# Altium PCB Connect_PCB.PcbDoc
Units mil, origin at the board's own origin, x right, y up, seen from the top; angles counter-clockwise.
Board outline 6000 x 4000 mil, 2 copper layers (Top Layer, Bottom Layer); 15 components, 34 nets, 130 pads, 14 vias.
Unrouted connection lines stored in the file: 1.
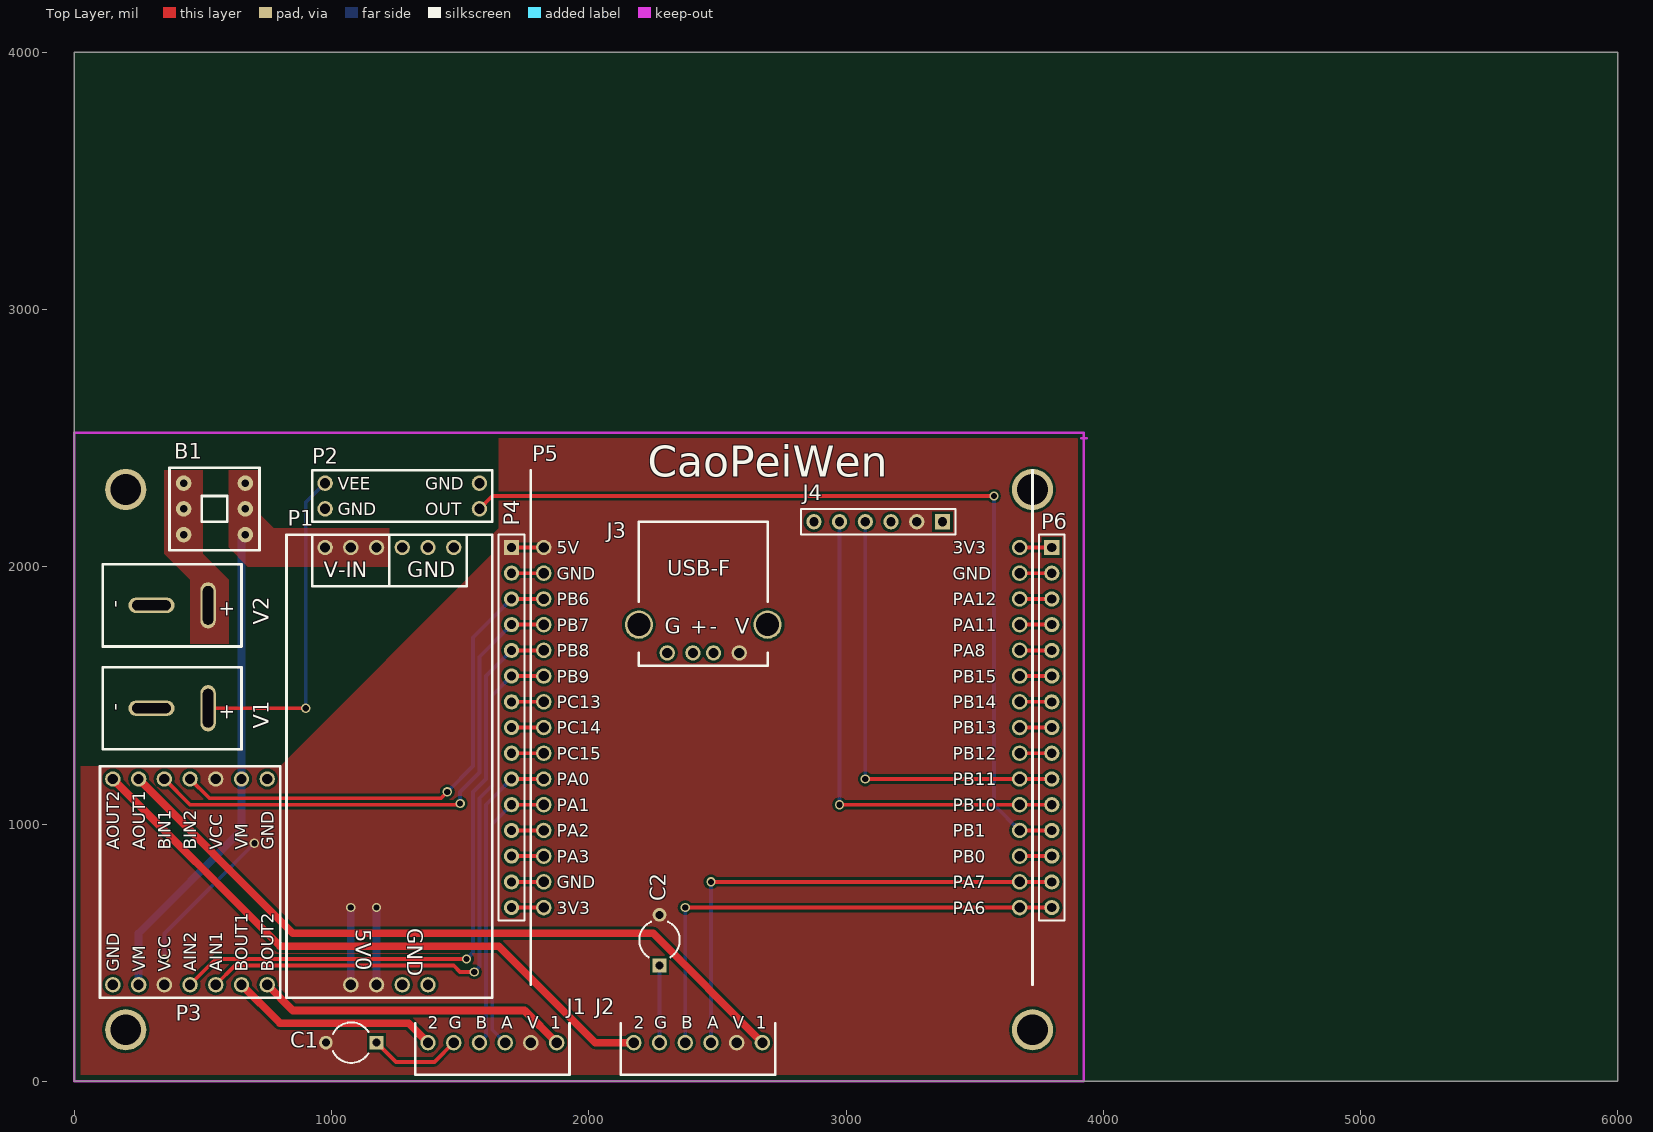
[diagram p0: Top Layer view]
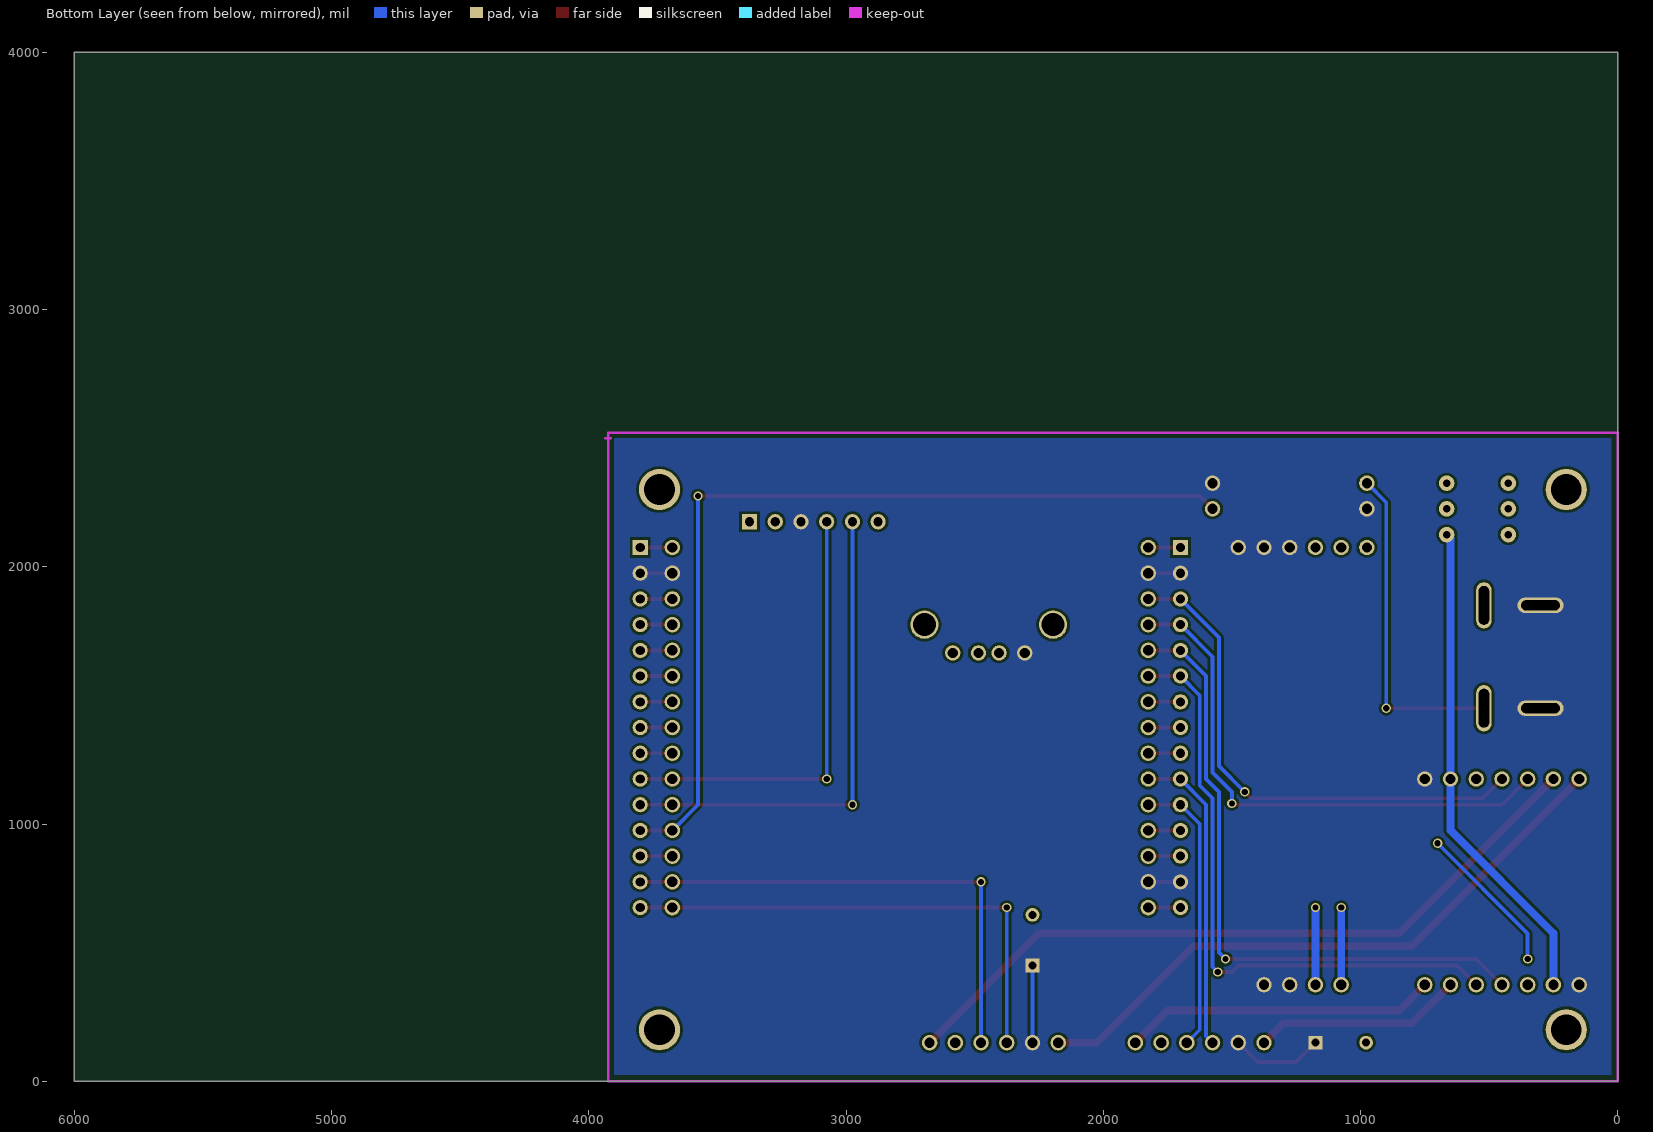
[diagram p1: Bottom Layer view, seen from below]

## Layer stack, top to bottom
Top Solder: solder mask 0.4, Solder Resist, Dk 3.5
Top Layer: signal copper 1.4
Dielectric 1: dielectric 12.6, FR-4, Dk 4.8
Bottom Layer: signal copper 1.4
Bottom Solder: solder mask 0.4, Solder Resist, Dk 3.5

## Board outline
0,0 6000,0 6000,4000 0,4000

## Design rules (kind name [scope] priority, off if disabled: settings)
Clearance [All] p1: gap=10
ComponentClearance [All] p1 off: gap=10 collisioncheckmode=3 verticalgap=10 showdistances=FALSE
HoleSize [All] p1: absolutevalues=TRUE maxlimit=300 minlimit=1 maxpercent=80.000 minpercent=20.000
PolygonConnect [All] p1: connectstyle=Direct reliefconductorwidth=15 reliefentries=4 polygonreliefangle="90 Angle" airgapwidth=10
RoutingVias [All] p1: holewidth=28 width=50 viastyle="Through Hole" minholewidth=28 minwidth=50 maxholewidth=100 maxwidth=100
SolderMaskExpansion [All] p1: expansion=4
Width [All] p1: maxlimit=30 minlimit=10 preferedwidth=15
28 further rules are at their usual default settings.

## Components (designator, comment, footprint, x,y, rotation, side; value= is the part's Value field where it differs from the comment)
B1 "Self-locking switch" "Self-locking switch" 545,2225 r0 top
C1 "Cap2" CAPR5-4X5 1076.57,150 r180 top
C2 "Cap2" CAPR5-4X5 2275,548.43 r90 top
J1 "MotorInterface_L" MotorInterface 1375,150 r0 top
J2 "MotorInterface_R" MotorInterface 2175,150 r0 top
J3 "USB-F" USB-F 2445,1665 r0 top
J4 "BlueTooth" HDR1X6 3375,2175 r180 top
P1 "VCC24T5" VCC24T5 1475,2075 r270 top
P2 "Battery_Voltage" PCBComponent_1 975,2325 r0 top
P3 "MotorDriver" "Motor Driver" 150,375 r90 top
P4 "Header 15" HDR1X15 1700,2075 r270 top
P5 "STM32_Forest_S1" STM32_Forest_S1 1825,2075 r0 top
P6 "Header 15" HDR1X15 3800,2075 r270 top
V1 "DC-XT" DC_XT 520,1450 r270 top
V2 "DC-XT" DC_XT 520,1850 r270 top

## Footprints (in the part's own frame and the unit in brackets; to place one, negate y for a bottom-side part, rotate by r counter-clockwise, add the part's x,y. Pads: shape width x height; smd on the part's side, far side on the other; paste and mask are expansions set on the pad)
CAPR5-4X5 [mm] "Capacitor; 2 Leads"
  rect 1.35x1.35 hole 0.8: 1(-2.5,0)
  round 1.35 hole 0.8: 2(2.5,0)
  silkscreen extent -1.69,-2 1.82,2
DC_XT [mil]
  oval 180x60 hole 40 slot 150 at 0 deg: 1(0,0)
  oval 60x180 hole 150 slot 40 at 0 deg: 2(0,-220)
  silkscreen extent -160,-410 160,130
HDR1X6 [mm] "Connector; Header; 6 Position"
  rect 1.5x1.5 hole 0.9: 1(0,0)
  round 1.5 hole 0.9: 2(2.54,0) 3(5.08,0) 4(7.62,0) 5(10.16,0) 6(12.7,0)
  silkscreen extent -1.27,-1.27 13.97,1.27
HDR1X15 [mm] "Connector; Header; 15 Position"
  rect 1.5x1.5 hole 0.9: 1(0,0)
  round 1.5 hole 0.9: 2(2.54,0) 3(5.08,0) 4(7.62,0) 5(10.16,0) 6(12.7,0) 7(15.24,0) 8(17.78,0) 9(20.32,0) 10(22.86,0) 11(25.4,0) 12(27.94,0) 13(30.48,0) 14(33.02,0) 15(35.56,0)
  silkscreen extent -1.27,-1.27 36.83,1.27
"Motor Driver" [mil]
  round 60 hole 40: 1(0,0) 2(0,-100) 3(0,-200) 4(0,-300) 5(0,-400) 6(0,-500) 7(0,-600) 8(800,-600) 9(800,-500) 10(800,-400) 11(800,-300) 12(800,-200) 13(800,-100) 14(800,0)
  silkscreen extent -50,-650 850,50
MotorInterface [mil]
  round 60 hole 40: 1(0,0) 2(100,0) 3(200,0) 4(300,0) 5(400,0) 6(500,0)
  silkscreen extent -50,-125 550,75
PCBComponent_1 [mil]
  round 60 hole 40: 1(0,0) 2(0,-100) 3(600,-100) 4(600,0)
  silkscreen extent -50,-150 650,50
"Self-locking switch" [mil]
  round 60 hole 30: 1(-120,-100) 1(-120,0) 1(-120,100) 2(120,-100) 2(120,0) 2(120,100)
  silkscreen extent -175,-160 175,160
STM32_Forest_S1 [mil]
  round 60 hole 40: 1(0,0) 2(0,-100) 3(0,-200) 4(0,-300) 5(0,-400) 6(0,-500) 7(0,-600) 8(0,-700) 9(0,-800) 10(0,-900) 11(0,-1000) 12(0,-1100) 13(0,-1200) 14(0,-1300) 15(0,-1400) 16(1850,-1400) 17(1850,-1300) 18(1850,-1200) 19(1850,-1100) 20(1850,-1000) 21(1850,-900) 22(1850,-800) 23(1850,-700) 24(1850,-600) 25(1850,-500) 26(1850,-400) 27(1850,-300) 28(1850,-200) 29(1850,-100) 30(1850,0)
  silkscreen extent -50,-1700 1900,300
USB-F [mil]
  round 110 hole 90: 0(-250,110) 0(250,110)
  round 60 hole 40: 1(140,0) 2(40,0) 3(-40,0) 4(-140,0)
  silkscreen extent -250,-50 250,510
VCC24T5 [mil] "VCC24T5"
  round 60 hole 40: 1(0,0) 2(0,-100) 3(0,-200) 4(0,-300) 5(0,-400) 6(0,-500) 7(1700,-400) 8(1700,-300) 9(1700,-200) 10(1700,-100)
  silkscreen extent -50,-650 1750,150

## Part data
C1 C2: "Capacitor"
J1 J2: library part MotorInterface
J4: library part "Header 6", "Header, 6-Pin"
P4 P6: "Header, 15-Pin"

## Free pads (board coordinates)
  round 160 hole 120: 0(200,200) 0(200,2300) 0(3725,200) 0(3725,2300)

## Via types
v1: diameter 36, hole 24, Top Layer to Bottom Layer, tented both sides, 14 vias

## Nets (pads, with @x,y where several pads share a name; then routed paths per layer and width w, separated by ;. In a path a pad name is that pad's centre, name@x,y a point inside that pad or via, vN(x,y) a via of type N, cw(c..) or ccw(c..) an arc to the next point about the centre after c; other vN are vias at no path point)
3V3: P4.15 P5.15 P5.30 P6.1 | length 250
  Top Layer w15: P4.15 P5.15 ; P5.30 P6.1
5V: C1.2 C2.2 J1.5 J2.5 J3.1 J4.2 P1.7 P1.8 P3.3 P3.10 P4.1 P5.1 | length 1320
  Top Layer w15: P4.1 P5.1
  Bottom Layer w15: v1(350,475) 350,575 v1(700,925)
  Bottom Layer w30: P1.7 v1(1075,675) ; P1.8 v1(1175,675)
AO1: J2.6 P3.13 | length 2849.6
  Top Layer w30: P3.13 850,575 2250,575 J2.6
AO2: J2.1 P3.14 | length 2449.6
  Top Layer w30: P3.14 800,525 1650,525 2025,150 J2.1
BO1: J1.1 P3.6 | length 818.2
  Top Layer w30: P3.6 800,225 1300,225 J1.1
BO2: J1.6 P3.7 | length 1218.2
  Top Layer w30: P3.7 850,275 1750,275 J1.6
GND: C1.1 C2.1 J1.2 J2.2 J3.4 J4.3 P1.1 P1.2 P1.3 P1.9 P1.10 P2.2 P2.4 P3.1 P3.8 P4.2 P4.14 P5.2 P5.14 P5.29 P6.2 V1.2 V2.2 | length 1037.1
  Top Layer w15: C1.1 1250,75 1400,75 J1.2 ; P4.14 P5.14 ; P4.2 P5.2 ; P5.29 P6.2
  Bottom Layer w15: J2.2 C2.1
NetP4_7: P4.7 P5.7 | length 125
  Top Layer w15: P4.7 P5.7
NetP4_8: P4.8 P5.8 | length 125
  Top Layer w15: P4.8 P5.8
NetP4_9: P4.9 P5.9 | length 125
  Top Layer w15: P4.9 P5.9
NetP4_12: P4.12 P5.12 | length 125
  Top Layer w15: P4.12 P5.12
NetP4_13: P4.13 P5.13 | length 125
  Top Layer w15: P4.13 P5.13
NetP5_18: P5.18 P6.13 | length 125
  Top Layer w15: P5.18 P6.13
NetP5_22: P5.22 P6.9 | length 125
  Top Layer w15: P5.22 P6.9
NetP5_23: P5.23 P6.8 | length 125
  Top Layer w15: P5.23 P6.8
NetP5_24: P5.24 P6.7 | length 125
  Top Layer w15: P5.24 P6.7
NetP5_25: P5.25 P6.6 | length 125
  Top Layer w15: P5.25 P6.6
NetP5_26: P5.26 P6.5 | length 125
  Top Layer w15: P5.26 P6.5
NetP5_27: P5.27 P6.4 | length 125
  Top Layer w15: P5.27 P6.4
NetP5_28: P5.28 P6.3 | length 125
  Top Layer w15: P5.28 P6.3
PA0: J1.3 P4.10 P5.10 | length 1201.8
  Top Layer w15: P4.10 P5.10
  Bottom Layer w15: J1.3 1600,175 1600,1075 P4.10
PA1: J1.4 P4.11 P5.11 | length 1101.8
  Top Layer w15: P4.11 P5.11
  Bottom Layer w15: J1.4 1625,200 1625,1000 P4.11
PA6: J2.3 P5.16 P6.15 | length 1950
  Top Layer w15: v1(2375,675) P5.16 P6.15
  Bottom Layer w15: J2.3 v1(2375,675)
PA7: J2.4 P5.17 P6.14 | length 1950
  Top Layer w15: v1(2475,775) P5.17 P6.14
  Bottom Layer w15: J2.4 v1(2475,775)
PB1: P2.3 P5.19 P6.12 | length 3487.1
  Top Layer w15: P2.3 1625,2275 v1(3575,2275) ; P5.19 P6.12
  Bottom Layer w15: v1(3575,2275) 3575,1075 P5.19
PB6: P3.11 P4.3 P5.3 | length 2020
  Top Layer w15: P3.11 525,1100 1425,1100 v1(1450,1125) ; P4.3 P5.3
  Bottom Layer w15: v1(1450,1125) 1550,1225 1550,1725 P4.3
PB7: P3.12 P4.4 P5.4 | length 2096.3
  Top Layer w15: P3.12 450,1075 1495,1075 v1(1500,1080) ; P4.4 P5.4
  Bottom Layer w15: v1(1500,1080) 1500,1125 1575,1200 1575,1650 P4.4
PB8: P3.4 P4.5 P5.5 | length 2513.9
  Top Layer w15: P3.4 550,475 v1(1525,475) ; P4.5 P5.5
  Bottom Layer w15: v1(1525,475) 1550,500 1550,1125 1600,1175 1600,1575 P4.5
PB9: P3.5 P4.6 P5.6 | length 2381.5
  Top Layer w15: P3.5 625,450 1475,450 1500,425 v1(1555,425) ; P4.6 P5.6
  Bottom Layer w15: v1(1555,425) 1575,445 1575,1100 1625,1150 1625,1500 P4.6
PB10: J4.5 P5.20 P6.11 | length 1925
  Top Layer w15: v1(2975,1075) P5.20 P6.11
  Bottom Layer w15: v1(2975,1075) J4.5
PB11: J4.4 P5.21 P6.10 | length 1725
  Top Layer w15: v1(3075,1175) P5.21 P6.10
  Bottom Layer w15: v1(3075,1175) J4.4
VEE_IN: P2.1 V1.1 | length 1286.1
  Top Layer w15: V1.1 v1(900,1450)
  Bottom Layer w15: v1(900,1450) 900,2250 P2.1
VM: B1.2 P1.4 P1.5 P1.6 P3.2 P3.9 | length 1921.9
  Bottom Layer w30: P3.2 250,575 650,975 P3.9 650,2110 B1.2@665,2125
VM_IN: B1.1 V2.1
pads on no net: J3.0 J3.2 J3.3 J4.1 J4.6

## Polygon pours and split planes (outlines as drawn)
VM on Top Layer "VM" (solid, remove dead copper, pour order 88): 600,2375 600,2075 675,2000 1225,2000 1225,2150 775,2150 725,2200 725,2375
VM_IN on Top Layer "VM_IN" (solid, remove dead copper, pour order 74): 350,2100 350,2050 450,1950 450,1700 600,1700 600,1950 500,2050 500,2375 350,2375
5V on Top Layer "5V" (solid, remove dead copper, pour order 102): 25,1225 25,25 3900,25 3900,2500 1650,2500 1650,2150 1625,2125 1625,2050 800,1225
GND on Bottom Layer "GND" (solid, remove dead copper, pour order 104): 25,25 25,2500 3900,2500 3900,25

## Keep-outs
Keep-Out Layer:
  lines w10: 3915,2500 3935,2500 ; 3925,2490 3925,2510 ; 0,0 3925,0 3925,2520.31 0,2520.31 0,0
  text "3925,2500 (mil)" at 3935,2500 h60

## Silkscreen, mask and mechanical layers (free items; w line width, h text height)
Top Overlay:
  text "CaoPeiWen" at 2230,2350 h120

## Text inside footprints (layer, text, board x,y; h text height)
J1: Top Overlay "2" at 1375,205 h48; Top Overlay "G" at 1455,205 h48; Top Overlay "B" at 1560,205 h48; Top Overlay "A" at 1660,205 h48; Top Overlay "V" at 1760,205 h48; Top Overlay "1" at 1850,205 h48
J2: Top Overlay "2" at 2175,205 h48; Top Overlay "G" at 2255,205 h48; Top Overlay "B" at 2360,205 h48; Top Overlay "A" at 2460,205 h48; Top Overlay "V" at 2560,205 h48; Top Overlay "1" at 2650,205 h48
J3: Top Overlay "V" at 2570,1740 h60; Top Overlay "-" at 2470,1740 h60; Top Overlay "+" at 2395,1740 h60; Top Overlay "G" at 2295,1740 h60
P1: Top Overlay "GND" at 1295,1960 h60; Top Overlay "V-IN" at 970,1960 h60; Top Overlay "GND" at 1295,595 h60 r270; Top Overlay "5V0" at 1095,590 h60 r270
P2: Top Overlay "VEE" at 1025,2300 h48; Top Overlay "GND" at 1025,2200 h48; Top Overlay "OUT" at 1365,2200 h48; Top Overlay "GND" at 1365,2300 h48
P3: Top Overlay "GND" at 175,425 h48 r90; Top Overlay "VM" at 275,425 h48 r90; Top Overlay "VCC" at 375,425 h48 r90; Top Overlay "AIN2" at 475,425 h48 r90; Top Overlay "AIN1" at 575,425 h48 r90; Top Overlay "BOUT1" at 675,425 h48 r90; Top Overlay "BOUT2" at 775,425 h48 r90; Top Overlay "GND" at 775,900 h48 r90; Top Overlay "VM" at 675,900 h48 r90; Top Overlay "VCC" at 575,900 h48 r90; Top Overlay "BIN2" at 475,900 h48 r90; Top Overlay "BIN1" at 375,900 h48 r90; Top Overlay "AOUT1" at 275,900 h48 r90; Top Overlay "AOUT2" at 175,900 h48 r90
P5: Top Overlay "5V" at 1875,2050 h48; Top Overlay "GND" at 1875,1950 h48; Top Overlay "PB6" at 1875,1850 h48; Top Overlay "PB7" at 1875,1750 h48; Top Overlay "PB8" at 1875,1650 h48; Top Overlay "PB9" at 1875,1550 h48; Top Overlay "PC13" at 1875,1450 h48; Top Overlay "PC14" at 1875,1350 h48; Top Overlay "PC15" at 1875,1250 h48; Top Overlay "PA0" at 1875,1150 h48; Top Overlay "PA1" at 1875,1050 h48; Top Overlay "PA2" at 1875,950 h48; Top Overlay "PA3" at 1875,850 h48; Top Overlay "GND" at 1875,750 h48; Top Overlay "3V3" at 1875,650 h48; Top Overlay "PA6" at 3415,650 h48; Top Overlay "PA7" at 3415,750 h48; Top Overlay "PB0" at 3415,850 h48; Top Overlay "PB1" at 3415,950 h48; Top Overlay "PB10" at 3415,1050 h48; Top Overlay "PB11" at 3415,1150 h48; Top Overlay "PB12" at 3415,1250 h48; Top Overlay "PB13" at 3415,1350 h48; Top Overlay "PB14" at 3415,1450 h48; Top Overlay "PB15" at 3415,1550 h48; Top Overlay "PA8" at 3415,1650 h48; Top Overlay "PA11" at 3415,1750 h48; Top Overlay "PA12" at 3415,1850 h48; Top Overlay "GND" at 3415,1950 h48; Top Overlay "3V3" at 3415,2050 h48
V1: Top Overlay "+" at 570,1470 h60 r270; Top Overlay "-" at 140,1470 h60 r270
V2: Top Overlay "+" at 570,1870 h60 r270; Top Overlay "-" at 140,1870 h60 r270